# Altium PCB AM32_ESCRev1.PcbDoc
Units mil, origin at the board's own origin, x right, y up, seen from the top; angles counter-clockwise.
Board outline 2092 x 1284 mil, 4 copper layers (Top Layer 1, Top Layer, Bottom Layer, Bottom Layer 1), stack 23.756 mil thick; 73 components, 48 nets, 256 pads, 59 vias.
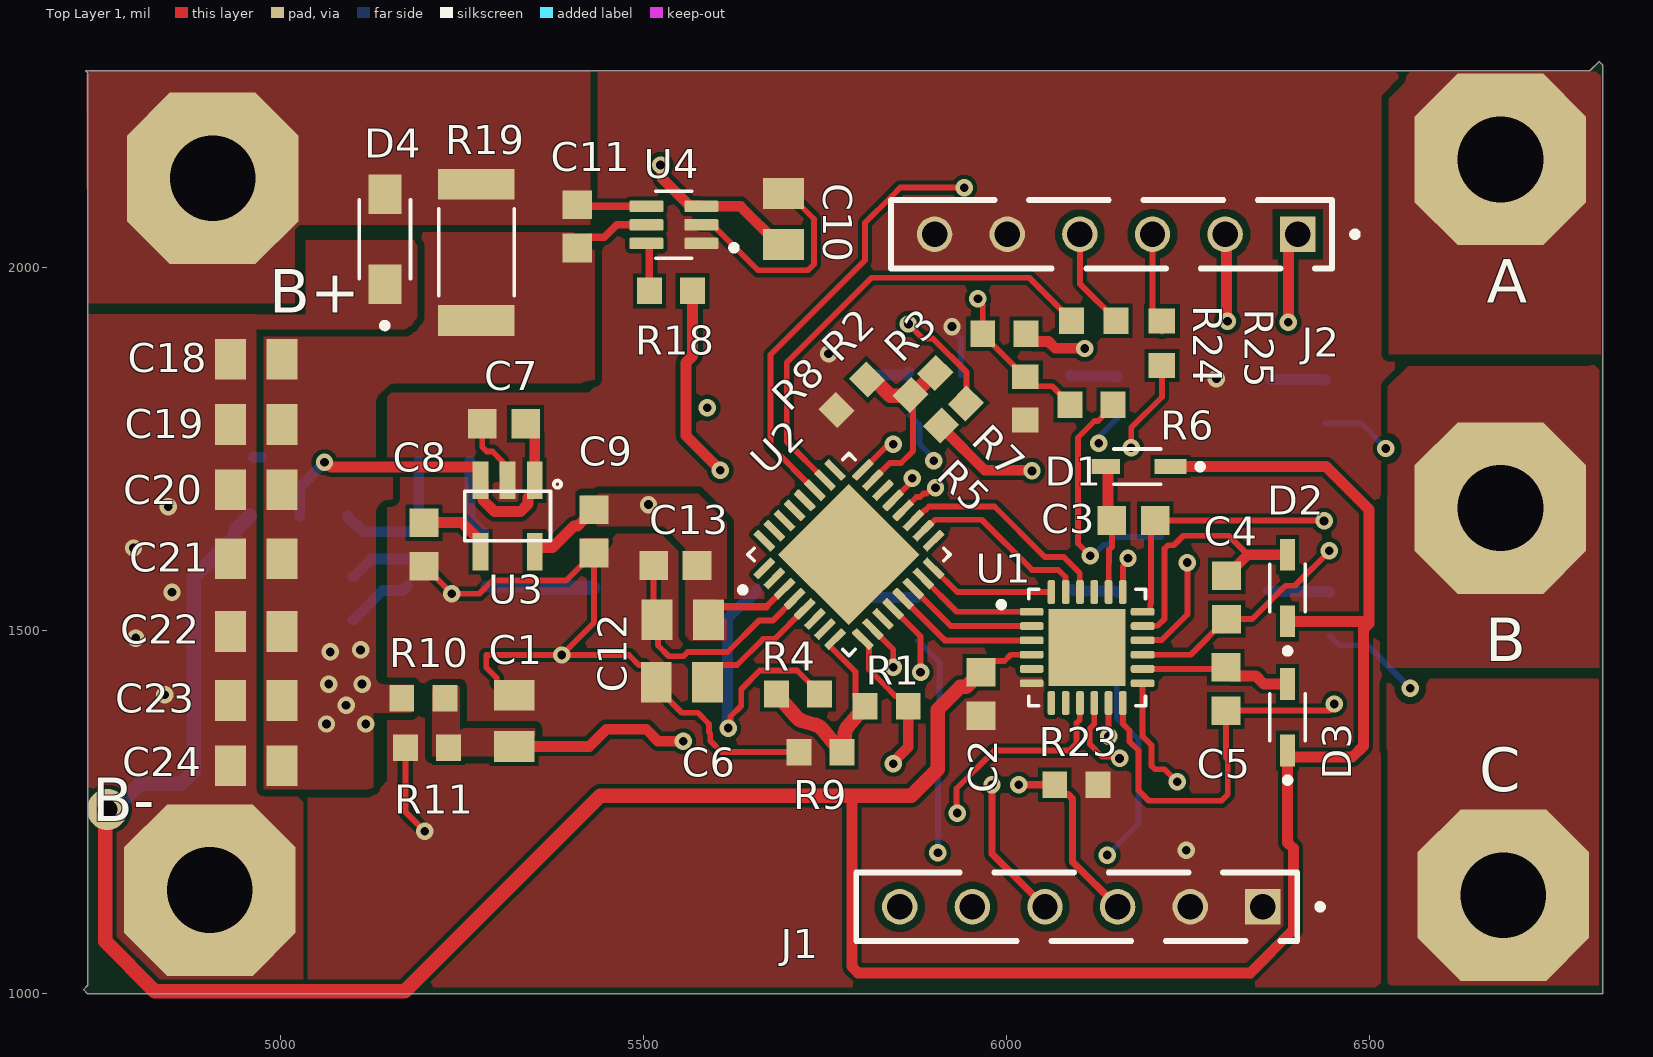
[diagram p0: Top Layer 1 view]
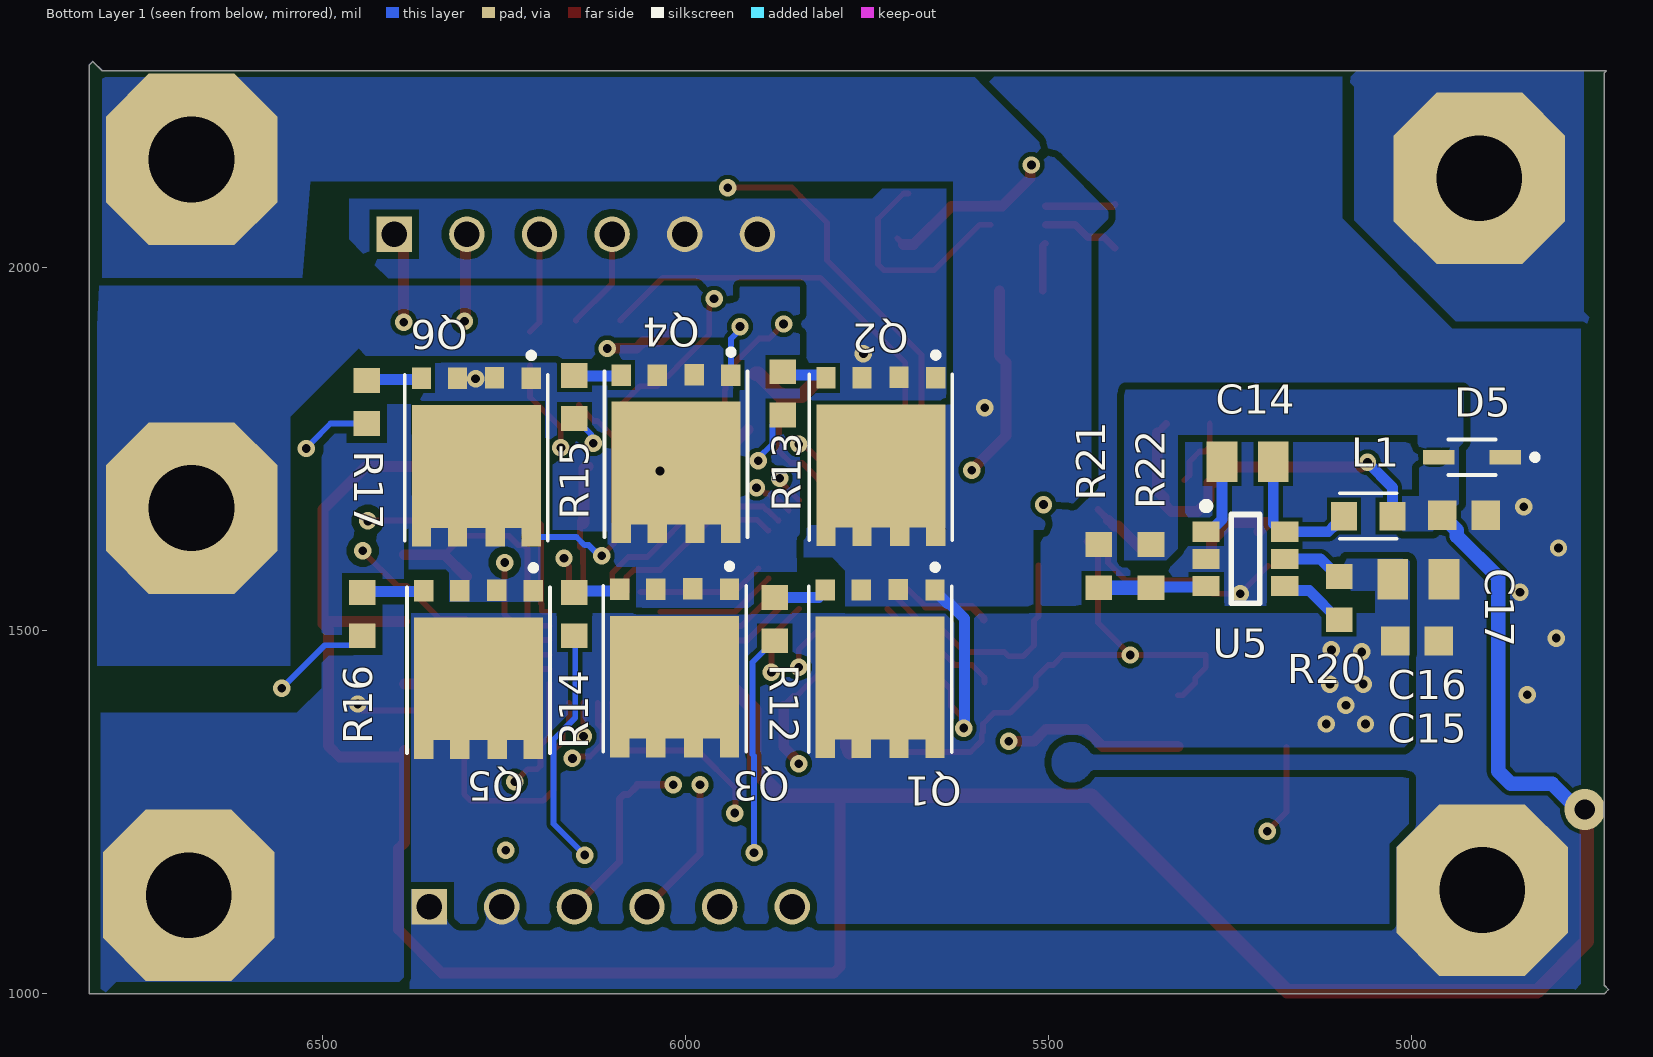
[diagram p1: Bottom Layer 1 view, seen from below]
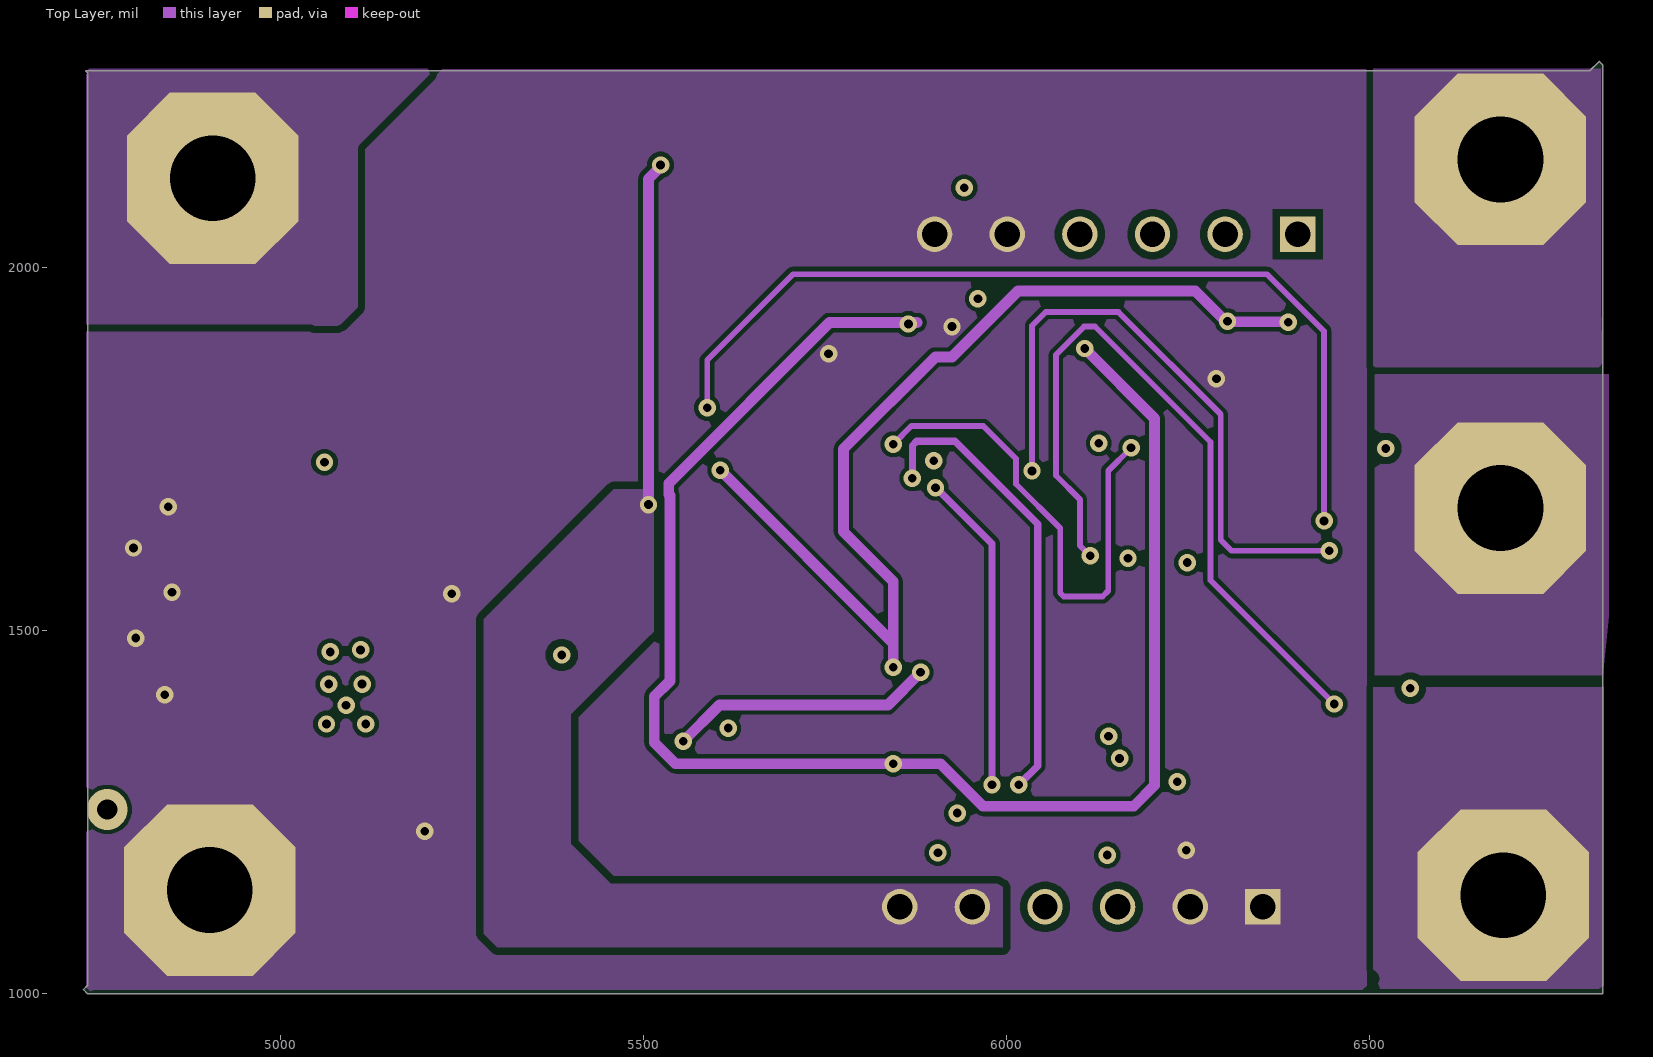
[diagram p2: Top Layer]
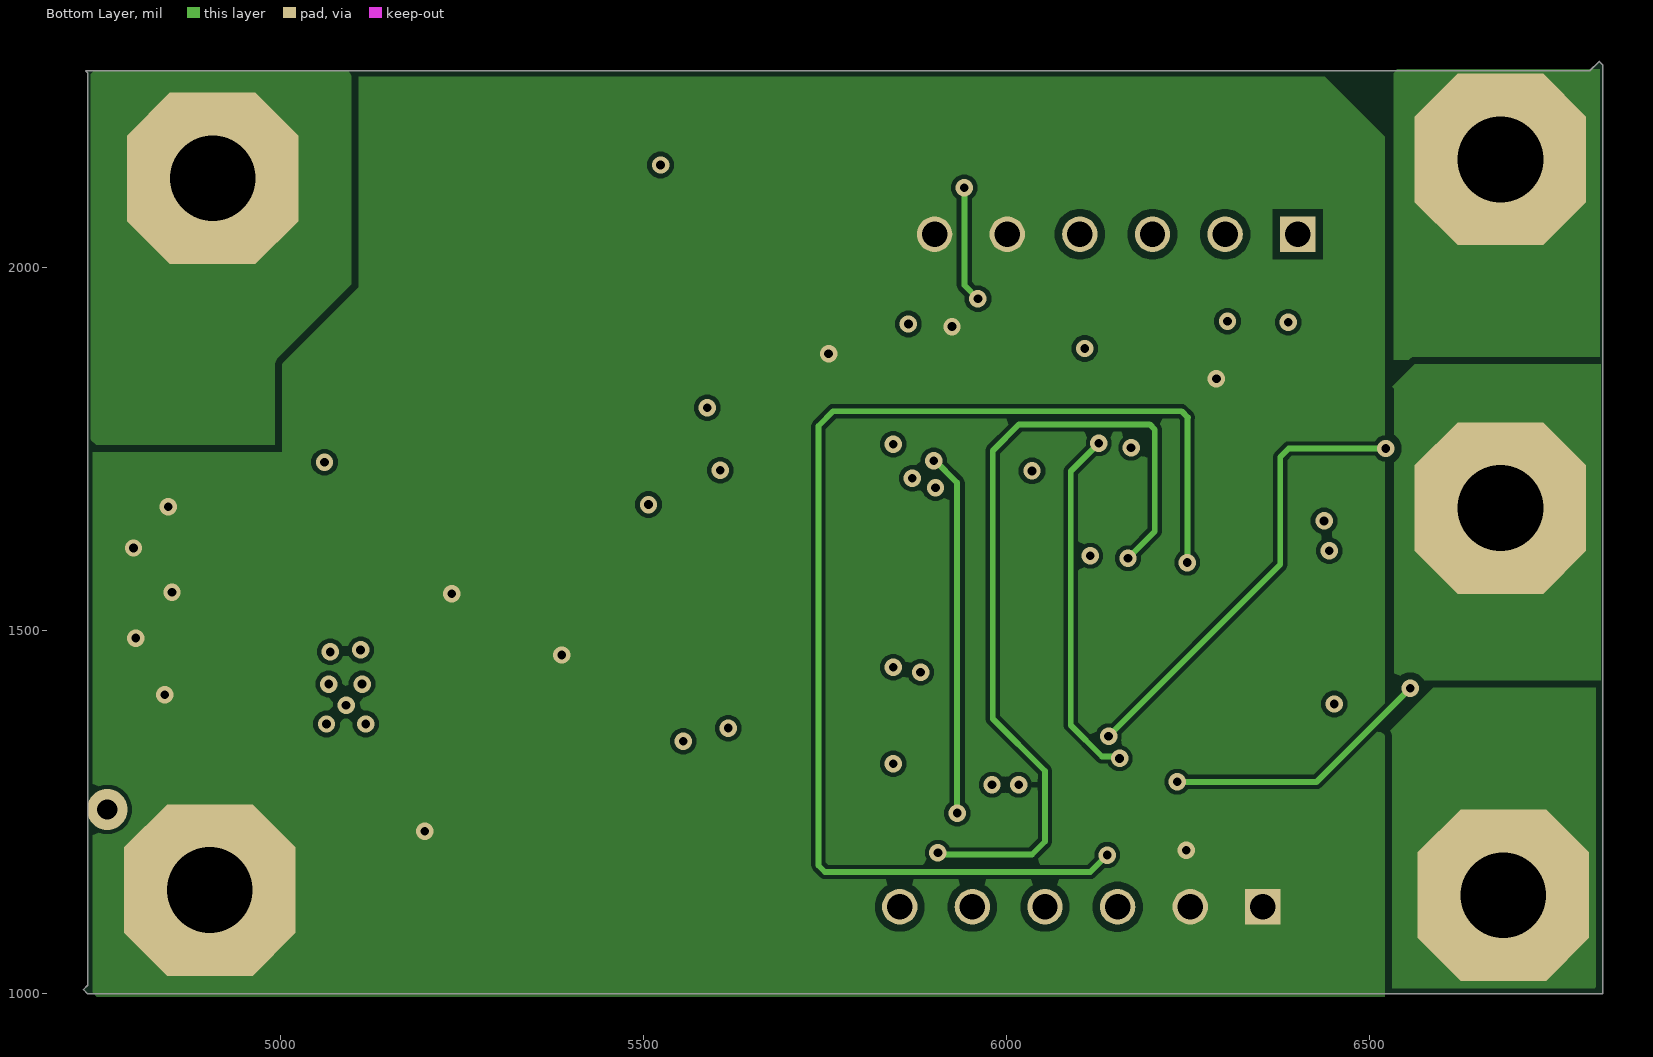
[diagram p3: Bottom Layer]
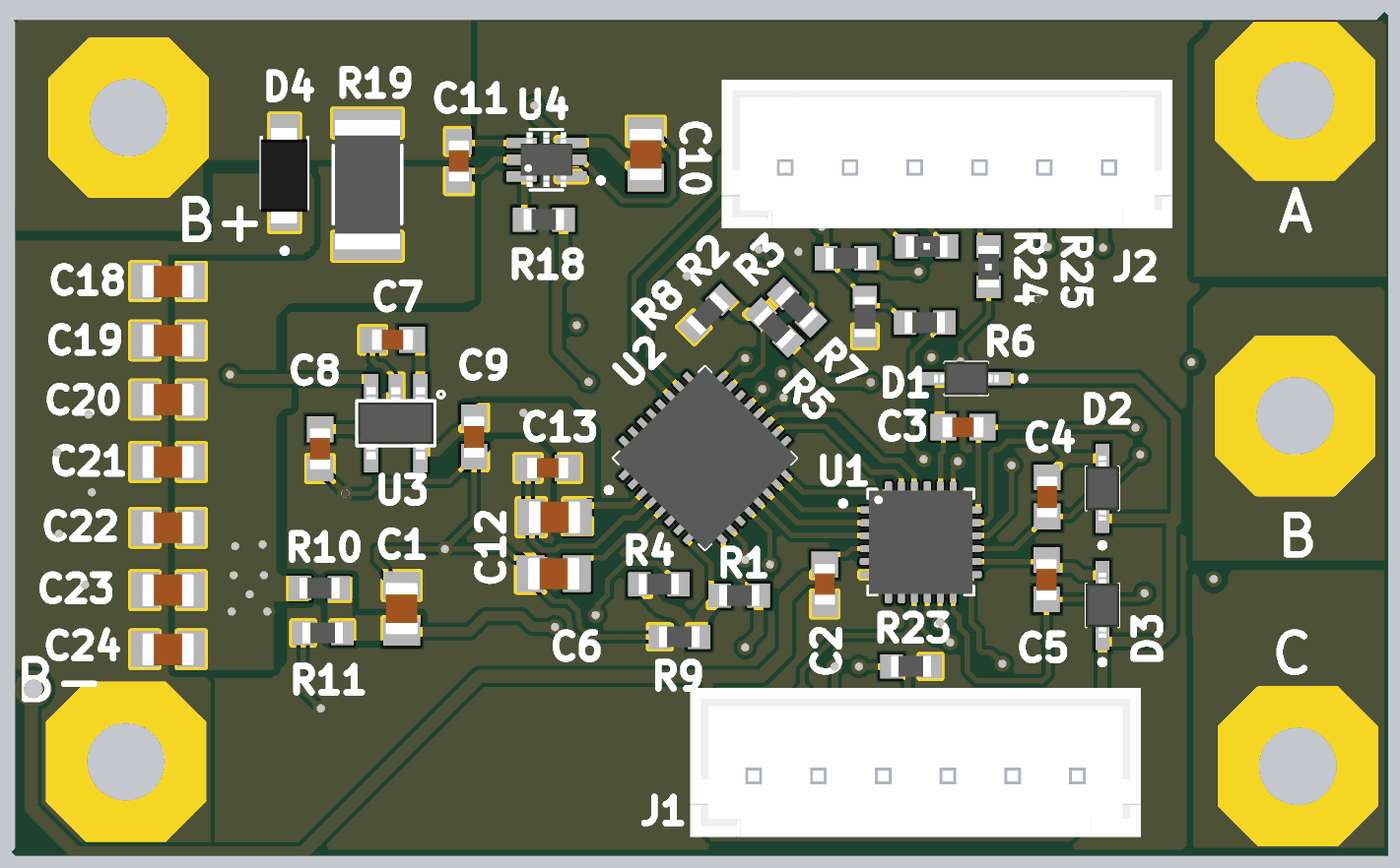
[diagram p4: 3D render of the assembled board from above, using the file's embedded part models]
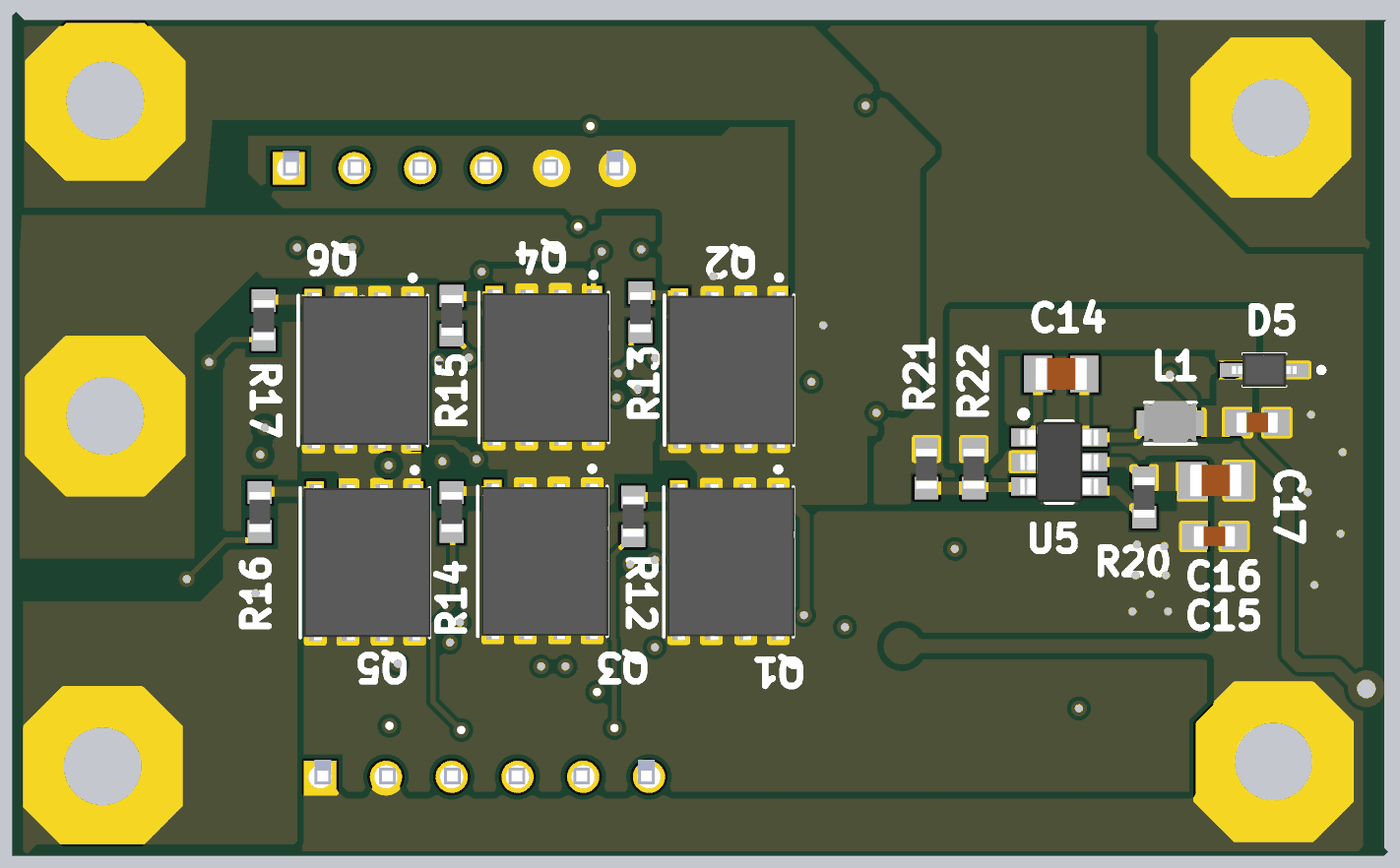
[diagram p5: 3D render of the assembled board from below, using the file's embedded part models]

## Layer stack, top to bottom
Top Solder: solder mask 0.4, Solder Resist, Dk 3.5
Top Layer 1: signal copper 1.378
Dielectric 2: prepreg 2.8, PP-006, Dk 4.1
Top Layer: signal copper 1.4
Dielectric 1: dielectric 12.6, FR-4, Dk 4.8
Bottom Layer: signal copper 1.4
Dielectric 3: prepreg 2.8, PP-006, Dk 4.1
Bottom Layer 1: signal copper 1.378
Bottom Solder: solder mask 0.4, Solder Resist, Dk 3.5

## Board outline
4735,2268 4735,1012 4729,1006 4735,1000 6821,1000 6821,2279 6816,2284 6803,2271 4732,2271

## Design rules (kind name [scope] priority, off if disabled: settings)
Clearance [All] p1: gap=6 ignorepadtopadclearanceinfootprint=FALSE except(10: THPad-THPad THPad-Fill THPad-Poly THPad-Region THPad-Text Fill-Fill Fill-Poly Fill-Region Fill-Text Poly-Poly Poly-Region Poly-Text Region-Region Region-Text Text-Text)
MinimumSolderMaskSliver [All] p1: minsoldermaskwidth=1
PolygonConnect [All] p1: connectstyle=Direct reliefconductorwidth=10 reliefentries=4 polygonreliefangle="90 Angle" airgapwidth=10
RoutingVias [All] p1: holewidth=28 width=50 viastyle="Through Hole" minholewidth=28 minwidth=50 maxholewidth=28 maxwidth=50
SilkToSilkClearance [All] p1: silktosilkclearance=4
SilkToSolderMaskClearance [IsPad] p1: minsilkscreentomaskgap=4 clearancetoexposedcopper=TRUE
SolderMaskExpansion SolderMaskExpansion_1 [All] p1: expansion=4 istentingtop=FALSE
SolderMaskExpansion SolderMaskExpansion_Via [IsVia] p2: expansion=4 istentingtop=TRUE soldermaskfromhole=TRUE
SupplyNets "Schematic Supply Nets_4" [InNet('8V')] p1: voltage=0.000
SupplyNets "Schematic Supply Nets_3" [InNet('VBAT')] p2: voltage=0.000
SupplyNets "Schematic Supply Nets_2" [InNet('3.3V')] p3: voltage=0.000
SupplyNets "Schematic Supply Nets_1" [InNet('GND')] p4: voltage=0.000
SupplyNets "Schematic Supply Nets" [InNet('VM')] p5: voltage=0.000
Width [All] p1: maxlimit=100 minlimit=8 preferedwidth=10 minimp=50.000000 maximp=50.000000 favimp=50.000000
27 further rules are at their usual default settings.

## Components (designator, comment, footprint, x,y, rotation, side; value= is the part's Value field where it differs from the comment)
A "PAD" PAD 6681,2150 r90 top
B "PAD" PAD 6681,1670 r90 top
B+ "PAD" PAD 4908,2124 r90 top
B- "PAD" PAD 4904,1144 r90 top
C "PAD" PAD 6685,1137 r90 top
C1 "100nF" C0805 5322,1376 r270 top
C2 "4.7uF" C0603 5965,1413 r90 top
C3 "1uF" C0603 6175,1652 r180 top
C4 "1uF" C0603 6303,1546 r90 top
C5 "1uF" C0603 6302,1420 r90 top
C6 "100nF" C0805 5553,1429 r0 top
C7 "1uF" C0603 5308,1785 r0 top
C8 "100pF" C0603 5198,1619 r270 top
C9 "2.2uF" C0603 5432,1637 r270 top
C10 "100nF" C0805 5693,2067 r270 top
C11 "1nF" C0603 5409,2057 r270 top
C12 "100nF" C0805 5554.24,1515 r0 top
C13 "4.7uF" C0603 5544,1590 r0 top
C14 "100nF" C0805 5226,1733 r180 bottom
C15 "100nF" C0805 4991,1571 r0 bottom
C16 "4.7uF" C0603 4993,1486 r0 bottom
C17 "10uF" C0603 4928,1659 r0 bottom
C18 "22uF" C0805 4967,1874 r0 top
C19 "22uF" C0805 4967,1784 r0 top
C20 "22uF" C0805 4967,1694 r0 top
C21 "22uF" C0805 4967,1599 r0 top
C22 "22uF" C0805 4967,1499 r0 top
C23 "22uF" C0805 4967,1404 r0 top
C24 "22uF" C0805 4967,1314 r0 top
D1 "Diode" SOD2512X116N 6180,1726 r180 top
D2 "Diode" SOD2512X116N 6387,1558.87 r90 top
D3 "Diode" SOD2512X116N 6387,1381 r90 top
D4 "SMF8.0A" SMF8.0 5144,2039 r90 top
D5 "Diode" SOD2512X116N 4917,1739 r0 bottom
J1 "JST_XH" "6 pin header" 6353,1120 r180 top
J2 "JST_XH" "6 pin header" 6401,2046 r180 top
L1 "6.8uH" L0806 5060,1658 r180 bottom
Q1 "CSD19531" MOSFET_CSD19531Q5A 5732,1446.86 r270 bottom
Q2 "CSD19531" MOSFET_CSD19531Q5A 5731,1738.86 r270 bottom
Q3 "CSD19531" MOSFET_CSD19531Q5A 6015,1447.86 r270 bottom
Q4 "CSD19531" MOSFET_CSD19531Q5A 6013,1742.86 r270 bottom
Q5 "CSD19531" MOSFET_CSD19531Q5A 6285,1445.86 r270 bottom
Q6 "CSD19531" MOSFET_CSD19531Q5A 6288.02,1738.3 r270 bottom
R1 "10K" R0603n 5835,1396 r180 top
R2 "10K" R0603n 5923,1834 r135 top
R3 "10K" R0603n 5997,1909 r180 top
R4 "47K" R0603N 5713,1413 r0 top
R5 "47K" R0603N 5888.73,1803.73 r315 top
R6 "47K" R0603N 6117,1811 r0 top
R7 "4.7K" R0603N 6026,1820 r90 top
R8 "4.7K" R0603N 5787,1825 r45 top
R9 "4.7K" R0603N 5744,1333 r0 top
R10 "47K" R0603N 5197,1407 r180 top
R11 "4.7K" R0603N 5202,1339 r0 top
R12 "10R" R0603n 5877,1516 r270 bottom
R13 "10R" R0603n 5866,1827 r90 bottom
R14 "10R" R0603n 6153,1523 r270 bottom
R15 "10R" R0603n 6153,1822 r90 bottom
R16 "10R" R0603n 6445,1523 r270 bottom
R17 "10R" R0603n 6439,1815 r90 bottom
R18 "56R" R0603N 5538,1968 r0 top
R19 "1m" RESC5025X120N 5270,2021 r270 top
R20 "100K" R0603N 5100,1545 r90 bottom
R21 "10K" R0603n 5431,1589 r270 bottom
R22 "90.9K" R0603N 5359,1589 r90 bottom
R23 "10K" R0603n 6096.14,1288 r0 top
R24 "100R" R0603 6214,1896 r270 top
R25 "100R" R0603 6120,1927 r180 top
U1 "FD6288Q" FD6288Q 6111,1477 r0 top
U2 "STM32G071" STM32G071 5783,1605 r45 top
U3 "AP2210K-3.3TRG1" AP2210K-3.3TRG1 5313,1658 r180 top
U4 "INA199A1DCKR" INA199A1DCKR 5542,2059 r180 top
U5 "JW5026" JW5026 5229,1599 r180 bottom

## Footprints (in the part's own frame and the unit in brackets; to place one, negate y for a bottom-side part, rotate by r counter-clockwise, add the part's x,y. Pads: shape width x height; smd on the part's side, far side on the other; paste and mask are expansions set on the pad)
"6 pin header" [mm]
  rect 1.24x1.24 hole 0.89: 01(0,0)
  round 1.24 hole 0.89: 02(2.54,0) 03(5.08,0) 04(7.62,0) 05(10.16,0) 06(12.7,0)
  silkscreen extent -2.1,-1.2 14.22,1.2, body extent -2.35,-3.43 15.05,2.32, height 6.51
AP2210K-3.3TRG1 [mm]
  rect 0.55x1.3 smd: 1(-0.95,-1.25) 2(0,-1.25) 3(0.95,-1.25) 4(0.95,1.25) 5(-0.95,1.25)
  silkscreen extent -1.87,-1.24 1.5,0.87, body extent -1.46,-1.4 1.46,1.4, height 1.45
C0603 [mm]
  rect 1x1.02 smd: 1(-0.759,0) 2(0.759,0)
  body extent -0.8,-0.4 0.8,0.4, height 1
C0805 [mm]
  rect 1.08x1.42 smd: 1(-0.895,0) 2(0.895,0)
  body extent -1,-0.63 1,0.63, height 1.4
FD6288Q [mm]
  rrect50% 0.83x0.27 smd: 1(-1.94,1.25) 2(-1.94,0.75) 3(-1.94,0.25) 4(-1.94,-0.25) 5(-1.94,-0.75) 6(-1.94,-1.25) 13(1.94,-1.25) 14(1.94,-0.75) 15(1.94,-0.25) 16(1.94,0.25) 17(1.94,0.75) 18(1.94,1.25)
  rrect50% 0.27x0.83 smd: 7(-1.25,-1.94) 8(-0.75,-1.94) 9(-0.25,-1.94) 10(0.25,-1.94) 11(0.75,-1.94) 12(1.25,-1.94) 19(1.25,1.94) 20(0.75,1.94) 21(0.25,1.94) 22(-0.25,1.94) 23(-0.75,1.94) 24(-1.25,1.94)
  rect 2.7x2.7 smd paste-2: 25(0,0)
  silkscreen extent -3.1,-2.04 2.04,2.04, body extent -2,-2 2,2, height 0.9
INA199A1DCKR [mm]
  rrect25% 1.19x0.4 smd: 1(-0.96,0.65) 2(-0.96,0) 3(-0.96,-0.65) 4(0.96,-0.65) 5(0.96,0) 6(0.96,0.65)
  silkscreen extent -2.2,-1.17 0.63,1.17, body extent -1.05,-1 1.05,1, height 1.1
JW5026 [mm] "SOT23, 6-Leads, Body 2.91x2.80mm, Pitch 0.95mm, IPC Medium Density"
  rect 0.95x0.7 smd: 1(-1.375,0.95) 2(-1.375,0) 3(-1.375,-0.95) 4(1.375,-0.95) 5(1.375,0) 6(1.375,0.95)
  silkscreen extent -1.5,-1.55 0.5,1.97, body extent -1.5,-1.55 1.5,1.55, height 1.25
L0806 [mm]
  rect 0.9x1 smd: 1(-0.85,0) 2(0.85,0)
  silkscreen extent -1,-0.8 1,0.8, body extent -1,-0.75 1,0.85, height 0.92
MOSFET_CSD19531Q5A [mm]
  rect 0.75x0.675 smd paste-1: 1(-2.776,1.917) 2(-2.794,0.635) 3(-2.776,-0.66) 4(-2.776,-1.917)
  rect 0.655x0.675 smd paste-1: 5(2.776,-1.917) 6(2.776,-0.66) 7(2.776,0.66) 8(2.776,1.917)
  rect 4.295x4.51 smd paste-3: 9(0.301,0)
  silkscreen extent -3.63,-2.5 2.9,2.5, body extent -3,-2.36 3,2.54, height 1.11
PAD [mm]
  oct 6x6 hole 3: 9(-0.025,0.025)
R0603 [mm]
  rect 0.87x0.93 smd: 1(-0.78,0) 2(0.78,0)
  body extent -0.8,-0.4 0.8,0.4, height 0.55
R0603n [mm]
  rect 0.87x0.93 smd: 1(-0.755,0) 2(0.755,0)
  body extent -0.77,-0.4 0.77,0.4, height 0.55
R0603N [mm]
  rect 0.87x0.93 smd: 1(-0.755,0) 2(0.755,0)
  body extent -0.77,-0.4 0.77,0.4, height 0.55
RESC5025X120N [mm]
  rect 1.07x2.67 smd: 1(-2.38,0) 2(2.38,0)
  silkscreen extent -1.52,-1.32 1.52,1.32, body extent -2.5,-1.25 2.5,1.25, height 1.2
SMF8.0 [mm]
  rect 1.38x1.15 smd: 1(-1.575,0) 2(1.575,0)
  silkscreen extent -3.11,-0.9 1.38,0.9, body extent -1.96,-0.88 1.74,0.92, height 1.26
SOD2512X116N [mm]
  rect 1.11x0.52 smd: 1(-1.165,0) 2(1.165,0)
  silkscreen extent -2.3,-0.62 0.82,0.62, body extent -1.25,-0.65 1.25,0.65, height 1.2
STM32G071 [mm]
  rrect25% 0.86x0.25 smd: 1(-2.435,1.75) 2(-2.435,1.25) 3(-2.435,0.75) 4(-2.435,0.25) 5(-2.435,-0.25) 6(-2.435,-0.75) 7(-2.435,-1.25) 8(-2.435,-1.75) 17(2.435,-1.75) 18(2.435,-1.25) 19(2.435,-0.75) 20(2.435,-0.25) 21(2.435,0.25) 22(2.435,0.75) 23(2.435,1.25) 24(2.435,1.75)
  rrect25% 0.25x0.86 smd: 9(-1.75,-2.435) 10(-1.25,-2.435) 11(-0.75,-2.435) 12(-0.25,-2.435) 13(0.25,-2.435) 14(0.75,-2.435) 15(1.25,-2.435) 16(1.75,-2.435) 25(1.75,2.435) 26(1.25,2.435) 27(0.75,2.435) 28(0.25,2.435) 29(-0.25,2.435) 30(-0.75,2.435) 31(-1.25,2.435) 32(-1.75,2.435)
  rect 3.5x3.5 smd paste-0.643: 33(0,0)
  silkscreen extent -3.6,-2.5 2.5,2.5, body extent -2.5,-2.5 2.5,2.5, height 0.6

## Part data
C1 C6 C10 C12 C14 C15: library part C100nF
C2 C13 C16: library part C4.7uF
C3 C4 C5 C7: library part C1uF
C8: library part C100pF
C9: library part C2.2uF
C11: library part C1nF
C17: library part C10uF
C18 C19 C20 C21 C22 C23 C24: library part C22uF
L1: library part L6.8uH
Q1 Q2 Q3 Q4 Q5 Q6: library part MOSFET
R1 R2 R3 R21 R23: library part R10K
R4 R5 R6 R10: library part R47K
R7 R8 R9 R11: library part R4.7K
R12 R13 R14 R15 R16 R17: library part R10
R18: library part R56
R19: library part R1m
R20: library part R100K
R22: library part R90.9k

## Via types
v1: diameter 24, hole 12, Top Layer 1 to Bottom Layer 1, tented both sides, 58 vias
v2: diameter 56, hole 28, Top Layer 1 to Bottom Layer 1, tented both sides, 1 vias

## Nets (pads, with @x,y where several pads share a name; then routed paths per layer and width w, separated by ;. In a path a pad name is that pad's centre, name@x,y a point inside that pad or via, vN(x,y) a via of type N, cw(c..) or ccw(c..) an arc to the next point about the centre after c; other vN are vias at no path point)
3.3V: C9.1 C10.2 C12.2 C13.2 J1.05 J1.06 U2.3 U3.5 U4.3 | length 948.3
  Top Layer 1 w8: 5669.34,1533 U2.3@5694.33,1557.99 ; C10.2@5699.69,2031.76 C10.2@5708.34,2040.41
  Top Layer 1 w10: C9.1@5417.31,1652.2 C9.1 ; C12.2 5589.47,1516.74 5605.73,1533 5669.34,1533
  Top Layer 1 w15: U3.5 5353.73,1612.11 5353.73,1614.57 5374.94,1614.57 5404.67,1644.3 5409.42,1644.3 C9.1@5417.31,1652.2 ; v1(5523.64,2141.36) 5525.36,2139.64 5525.36,2123.47 5563.87,2084.96 5579.42,2084.96 U4.3 5633.48,2084.59 5686.31,2031.76 C10.2 C10.2@5699.69,2031.76
  Top Layer w15: v1(5507.05,1673.83) 5507.05,2122.33 5523.64,2138.92 v1(5523.64,2141.36)
8V: C2.2 C7.2 C17.2 D1.1 D2.1 D3.1 D5.2 L1.2 R22.2 U1.4 U3.1 U3.3 | length 4782.2
  Top Layer 1 w8: C2.2 5980.69,1458.57 5997.39,1458.57 6005.98,1467.16 U1.4
  Top Layer 1 w10: C7.2 C7.2@5350.4,1772.48
  Top Layer 1 w15: v1(5061,1732) 5063.44,1732 5070.13,1725.3 5272.27,1725.3 U3.3@5272.27,1703.89 ; U3.3 5278.93,1703.89 5278.93,1689.12 5278.93,1680.12 5294.92,1664.12 5331.08,1664.12 5341.33,1674.37 5341.33,1683.37 5350.4,1692.45 U3.1 C7.2@5350.4,1772.48 ; 5785,1273 5787,1271 5787,1037.79 5795.79,1029 6335.57,1029 6394.91,1088.34 6394.91,1200.61 6387,1208.52 D3.1@6387,1328.74 ; D1.1 6440,1726 6499,1667 6499,1509.72 6491.5,1502.22 6491.5,1341.5 6476,1326 6389.74,1326 D3.1@6387,1328.74 ; D3.1 D3.1@6387,1328.74 ; D2.1 6494,1513 6498.14,1508.86
  Top Layer 1 w20: v2(4762,1254) 4758.89,1250.89 4758.89,1072.32 4827.32,1003.89 5171.6,1003.89 5440.71,1273 5785,1273 5869,1273 5905.45,1309.45 5905.45,1391.61 5936.64,1422.8 5944.53,1422.8 5964.61,1442.88 C2.2
  Bottom Layer 1 w15: D5.2 D5.2@4974.48,1739 ; L1.2 5026.54,1697.54 v1(5061,1732)
  Bottom Layer 1 w20: v2(4762,1254) 4771.74,1254 4806.91,1289.17 4863.68,1289.17 4881,1306.5 4881,1573.73 4937.8,1630.54 4937.8,1638.53 4957.88,1658.61 C17.2
ADC_BAT: C1.2 R10.1 R11.2 U2.12 | length 718.6
  Top Layer 1 w8: U2.12 5881.67,1492.41 v1(5881.67,1443)
  Top Layer 1 w15: C1.2 5425.42,1340.76 5449.15,1364.5 5503.88,1364.5 5520.38,1348 v1(5555,1348)
  Top Layer w15: v1(5555,1348) 5605,1398 5836.67,1398 v1(5881.67,1443)
ADC_CUR: J2.01 J2.02 R18.2 U2.10 | length 1965.5
  Top Layer 1 w8: U2.10 5844,1474.4 v1(5844,1450) ; J2.02 J2.02@6303,2044 ; J2.01@6388,2033 J2.01
  Top Layer 1 w15: R18.2 5567.72,1878.6 5558.5,1869.37 5558.5,1768.5 v1(5606,1721) ; v1@6303,1926.1 J2.02@6303,2044 ; v1(6388,1925) J2.01@6388,2033
  Top Layer w8: v1(6304.23,1926.1) v1@6304.78,1925.55 ; v1@6387.45,1925.55 v1(6388,1925)
  Top Layer w15: v1(5606,1721) 5842.5,1484.5 ; v1(5844,1450) 5844,1484.5 5844,1567.98 5775.31,1636.66 5775.31,1750.31 5902,1877 5925,1877 6016,1968 6259.89,1968 6301.79,1926.1 v1(6304.23,1926.1) ; v1@6304.78,1925.55 v1@6387.45,1925.55
ESC_S1: R24.2 U2.24 | length 877
  Top Layer 1 w8: U2.24 5834.5,1753.94 5840.94,1753.94 v1(5844,1757) ; v1(6171.54,1751.87) 6171.87,1752.21 6171.87,1779.87 6214,1822 R24.2
  Top Layer w8: v1(5844,1757) 5869,1782 5968,1782 6013.05,1736.95 6013.05,1702.16 6074,1641.21 6074,1552 6078.69,1547.31 6132.31,1547.31 6140,1555 6140,1720.34 v1(6171.54,1751.87)
FB: R21.2 R22.1 U5.3 | length 148.8
  Bottom Layer 1 w15: U5.3 5284.3,1560.44 5357.84,1560.44 R22.1
  Bottom Layer 1 w20: R22.1 R21.2
GND: B-.9 C1.1 C2.1 C6.1 C7.1 C8.2 C9.2 C10.1 C12.1 C13.1 C15.1 C16.1 C17.1 C18.1 C19.1 C20.1 C21.1 C22.1 C23.1 C24.1 D4.1 D5.1 J1.01 J1.02 J2.05 J2.06 Q2.1 Q2.2 Q2.3 Q4.1 Q4.2 Q4.3 Q6.1 Q6.2 Q6.3 R7.1 R8.1 R9.1 R11.1 R21.1 R23.2 U1.6 U2.4 U3.2 U4.1 U4.2 U5.2 | length 1992.9
  Top Layer 1 w8: R11.1@5172.28,1340.18 R11.1 5172.28,1250.72 v1(5199,1224) ; C8.2 5198.39,1589.12 5236,1551.51 v1(5236,1551) 5274.03,1551 5292.22,1569.2 5393.69,1569.2 5418.33,1593.84 5418.33,1622.8 C9.2@5448.08,1622.8 ; C7.1@5278.12,1785.39 C7.1 5278.12,1752.92 5284.24,1746.8 5292.22,1746.8 5306.17,1732.85 5306.17,1714.04 U3.2 ; C1.1 5315.31,1411.24 5298.05,1428.5 5298.05,1435.19 5283.64,1449.6 5283.64,1466.67 v1(5387.67,1466.67) ; C9.2 5432,1511 v1(5387.67,1466.67) ; C13.1 5514.12,1519.88 C12.1 5520.27,1513.73 5520.27,1479.73 5535,1465 5555.22,1465 5561.18,1470.95 5615.95,1470.95 5659,1514 5678.08,1514 U2.4 ; U4.2 5595.35,2059 5657.84,1996.5 5726.75,1996.5 5734.95,2004.7 5734.95,2066.98 5699.69,2102.24 C10.1 ; R9.1 5607.73,1333 5592.05,1348.68 5592.05,1358.77 5590.5,1360.32 5590.5,1371.82 5575.27,1387.05 5553.02,1387.05 5517.76,1422.31 C6.1 5517.76,1435.69 5500.5,1452.95 5493.81,1452.95 5480.1,1466.67 v1(5387.67,1466.67)
  Bottom Layer 1 w8: v1(5924.94,1918.94) 5924.94,1914.61 5937.51,1902.05 Q4.1
  other v1: 6247.67,1197.67 4841,1412 4801,1490 4851,1553 4798,1614 4846,1671 6289,1847 5755,1881.67
MOS_AH: R12.2 U1.19 | length 1513.8
  Top Layer 1 w8: U1.19 6160.21,1588.64 6167.24,1595.67 v1(6167.24,1600)
  Bottom Layer w8: v1(5905.55,1194.24) 5907.79,1192 6035,1192 6053,1210 6053,1307 5981,1379 5981,1748 6017.24,1784.24 6197.08,1784.24 6204,1777.31 6204,1636.76 v1(6167.24,1600)
  Bottom Layer 1 w8: R12.2 5878.18,1486.28 5907.67,1456.79 5907.67,1330.05 5905.55,1327.93 5905.55,1195.55 v1@5904,1194
MOS_AL: R13.1 U1.9 | length 860.3
  Top Layer 1 w8: v1(5932,1249) 5931,1250 5931,1283 5983,1335 6086,1335 6096.53,1345.53 6096.53,1372.99 6100.79,1377.25 6100.79,1400.25 U1.9
  Bottom Layer w8: v1(5900,1734) 5902,1734 5932,1704 v1(5932,1249)
  Bottom Layer 1 w8: R13.1 5867.18,1797.28 5880.31,1784.15 5880.31,1757.12 5900,1737.43 v1(5900,1734)
MOS_BH: R14.2 U1.16 | length 2217.1
  Top Layer 1 w8: U1.16 6187.75,1487.21 6213.73,1487.21 6249,1522.48 v1(6249,1594)
  Bottom Layer w8: v1(6138.55,1191.24) 6115.31,1168 5750,1168 5741,1177 5741,1782 5761.24,1802.24 6241.14,1802.24 6249.69,1793.69 6249,1793 v1(6249,1594)
  Bottom Layer 1 w8: v1(6138.55,1191.24) 6181.64,1234.33 6181.64,1350.43 6151.82,1380.24 6151.82,1492.09 R14.2
MOS_BL: R15.1 U1.10 | length 644.2
  Top Layer 1 w8: U1.10 6120.84,1371.85 6114.53,1365.54 6114.53,1344 6131.64,1326.89 6153.06,1326.89 v1(6155.64,1324.31)
  Bottom Layer w8: v1(6127,1758.24) 6088.56,1719.8 6088.56,1369.96 6131.64,1326.89 6153.06,1326.89 v1(6155.64,1324.31)
  Bottom Layer 1 w8: v1(6127,1758.24) 6130.06,1761.3 6130.06,1770.52 6151.82,1792.28 R15.1
MOS_CH: R16.2 U1.13 | length 678.7
  Top Layer 1 w8: U1.13 6187.38,1354.8 6199.64,1342.53 6199.64,1314.03 6204.32,1309.34 6217.66,1309.34 v1(6235,1292)
  Bottom Layer w8: v1(6235,1292) 6427,1292 v1(6556,1421)
  Bottom Layer 1 w8: R16.2 6458.13,1480.15 6496.85,1480.15 v1(6556,1421)
MOS_CL: R17.1 U1.11 | length 766.5
  Top Layer 1 w8: v1(6140.53,1354.77) U1.11
  Bottom Layer w8: v1(6140.53,1354.77) 6377,1591.24 6377,1739.31 6388.69,1751 v1(6522,1751)
  Bottom Layer 1 w8: R17.1 6488.72,1785.28 v1@6516,1758
MOTOR_A: A.9 C3.1 Q1.1 Q1.2 Q1.3 Q2.5 Q2.6 Q2.7 Q2.8 Q2.9 R4.2 U1.18 | length 2033.9
  Top Layer 1 w8: v1(5617.01,1366.04) 5620.07,1369.1 5620.07,1382.07 5634.68,1396.68 5634.68,1419.63 5660.35,1445.31 5711.6,1445.31 5742.72,1414.18 R4.2 ; U1.18 6196.6,1526.21 6197.91,1527.53 6197.91,1536.75 6199,1537.83 6199,1646.12 C3.1 v1@6433,1652
  Top Layer w8: v1@5588,1800.22 5588,1873 5706,1991 6358.77,1991 6437.24,1912.53 v1(6437.24,1651.27)
  Bottom Layer 1 w15: v1(5617.01,1366.04) 5616,1367.05 5616,1517.08 5636.33,1537.4 5639.23,1537.4 5656.51,1554.68 Q1.1
  other v1: 5588,1807
MOTOR_B: B.9 C4.1 Q3.1 Q3.2 Q3.3 Q4.5 Q4.6 Q4.7 Q4.8 Q4.9 R5.2 U1.15 | length 1312.4
  Top Layer 1 w8: U1.15 6253.65,1467.16 6302.61,1516.12 C4.1 6338.23,1516.12 6384.11,1562 6397,1562 v1@6445,1610
  Top Layer 1 w15: R5.2@5914.02,1776.98 5970,1721 v1@6032,1721
  Top Layer w8: v1(6035.05,1720.15) 6035.05,1920.05 6054,1939 6154,1939 6295,1798 6295,1625 6309.73,1610.27 v1(6444.24,1610.27)
MOTOR_C: C5.1 C.9 Q5.1 Q5.2 Q5.3 Q6.5 Q6.6 Q6.7 Q6.8 Q6.9 R6.2 U1.12 | length 1896.6
  Top Layer 1 w8: v1(6115.24,1603.27) 6098.28,1620.25 6098.28,1766.29 6120.99,1789 6125.91,1789 6146.72,1809.82 R6.2 ; U1.12 6160.21,1371.85 6169.38,1362.69 6169.38,1347.34 6181.64,1335.08 6181.64,1280.36 6196,1266 6296,1266 6304.69,1274.69 6304.69,1323.22 6302,1325.9 C5.1 6445.12,1390.12 v1@6450,1395
  Top Layer w8: v1(6115.24,1603.27) 6101,1617.51 6101,1681 6068,1714 6068,1880.11 6106.89,1919 6122,1919 6281,1760 6281,1569.51 v1(6451.24,1399.27)
  Bottom Layer 1 w8: v1(6115.24,1603.27) 6118.61,1603.27 6133.31,1617.96 6138.96,1617.96 6150,1629 Q6.8
NetC6_2: C6.2 U2.5 | length 179.8
  Top Layer 1 w8: C6.2 5588.24,1435.69 5605.5,1452.95 5629,1452.95 5664.89,1488.85 5680.77,1488.85 U2.5
NetC8_1: C8.1 U3.4 | length 120.1
  Top Layer 1 w15: C8.1@5210.19,1636.7 C8.1 5250.27,1648.88 5275.6,1623.55 U3.4
NetC14_1: C14.1 U5.1 | length 108.6
  Bottom Layer 1 w10: U5.1@5278.21,1636.4 U5.1
  Bottom Layer 1 w15: C14.1 5261.24,1653.38 U5.1@5278.21,1636.4
NetC14_2: C14.2 L1.1 U5.6 | length 197.6
  Bottom Layer 1 w15: L1.1 5093.46,1656.03 5103.68,1645.81 5105.65,1645.81 5115.06,1636.4 U5.6 5179.79,1636.4 5190.76,1647.38 C14.2
NetJ2_3: J2.03 R24.1 | length 139.7
  Top Layer 1 w8: J2.03 6201,1924.71 R24.1@6214,1911.71
NetJ2_4: J2.04 R25.1 | length 139.6
  Top Layer 1 w8: J2.04 6101,1977.89 6150.71,1928.18 R25.1
NetQ1_4: Q1.4 R12.1 | length 74.7
  Bottom Layer 1 w15: Q1.4 5807.49,1554.68 5816.45,1545.72 R12.1
NetQ2_4: Q2.4 R13.2 | length 63.1
  Bottom Layer 1 w15: Q2.4 5810.77,1852.44 5861.72,1852.44 R13.2
NetQ3_4: Q3.4 R14.1 | length 64.3
  Bottom Layer 1 w15: Q3.4 6092.71,1554.94 6150.78,1554.94 R14.1
NetQ4_4: Q4.4 R15.2 | length 65.5
  Bottom Layer 1 w15: Q4.4 6089.71,1850.94 6151.78,1850.94 R15.2@6153,1849.72
NetQ5_4: Q5.4 R16.1 | length 85.5
  Bottom Layer 1 w15: Q5.4 6361.71,1553.94 6443.78,1553.94 R16.1
NetQ6_4: Q6.4 R17.2 | length 76.7
  Bottom Layer 1 w15: Q6.4 6364.95,1846.16 6437.56,1846.16 R17.2
NetR18_1: R18.1 U4.6 | length 67.8
  Top Layer 1 w10: U4.6 5505.4,2033.41 5508.28,2030.54 R18.1
NetR20_1: R20.1 U5.4 | length 94.1
  Bottom Layer 1 w15: R20.1 5101.18,1515.28 5141.22,1555.32 5168.59,1555.32 U5.4
PWM_AH: U1.22 U2.19 | length 300.8
  Top Layer 1 w8: U2.19 5872.75,1651.91 5886.93,1666.1 5888.46,1666.1 5893.37,1671.01 5983.52,1671.01 6052.82,1601.72 6078.8,1601.72 6100.79,1579.73 U1.22@6100.79,1553.75
PWM_AL: U1.1 U2.15 | length 168
  Top Layer 1 w8: U2.15 5931.38,1526.21 U1.1
PWM_BH: U1.23 U2.18 | length 255.2
  Top Layer 1 w8: U2.18 5886.67,1637.99 5901.69,1653.01 5965.99,1653.01 6035.28,1583.72 6071.34,1583.72 6081.1,1573.96 6081.1,1553.75 U1.23
PWM_BL: U1.2 U2.14 | length 184.3
  Top Layer 1 w8: U2.14 5923.23,1506.53 U1.2
PWM_CH: U1.24 U2.16 | length 175.8
  Top Layer 1 w8: U2.16 5932.06,1553.38 U1.24
PWM_CL: U1.3 U2.13 | length 200.6
  Top Layer 1 w8: U2.13 5915.08,1486.84 U1.3
SENSE_A: R1.2 R4.1 R9.2 U2.8 | length 313.1
  Top Layer 1 w8: U2.8 5756.31,1480.87 5756.31,1479.57 5792.15,1443.73 5792.15,1409.13 R1.2
  Top Layer 1 w20: R4.1 5690.4,1404.69 5710.51,1381.57 ccw(c5725.6,1394.69) 5719.97,1375.5 5737.03,1370.5 cw(c5731.4,1351.31) 5746.99,1363.84 5758.4,1349.65 ccw(c5781.78,1368.44) 5760.76,1347.04 5766.6,1341.31 R9.2 5777.02,1341.31 5777.02,1355.49 cw(c5797.02,1355.49) 5781.78,1368.44 5798.15,1387.69 R1.2
SENSE_B: R2.2 R5.1 R8.2 U2.23 | length 261.3
  Top Layer 1 w8: U2.23@5817.07,1707.59 U2.23 5839.4,1731 5854.77,1731 5871.15,1747.38 5871.15,1818.18 R5.1@5871.98,1819.02
  Top Layer 1 w20: R8.2 5818.1,1846.02 5840.2,1823.92 5866.88,1823.92 R5.1 5870.72,1824.75 5899.98,1854.02 R2.2@5902.98,1854.02
SENSE_C: R3.2 R6.1 R7.2 U2.27 | length 977.4
  Top Layer 1 w8: U2.27 5675,1754.76 5675,1880 5805.21,2010.21 5805.21,2061.68 5841.58,2098.04 5853.73,2110.23 v1(5942,2110.23) ; v1@5960,1956 5967.28,1948.72 R3.2 5967.28,1907.82 6011.69,1863.4 6011.69,1862.85 6024.82,1849.72 R7.2 6039.13,1836.6 6062.86,1836.6 6087.28,1812.18 R6.1
  Bottom Layer w8: v1(5942,2110.23) 5942,1975.69 v1(5960.67,1957.02)
SENSE_O: R1.1 R2.1 R3.1 U2.9 | length 2625.8
  Top Layer 1 w8: U2.9 5810.56,1480 5810.56,1446.67 5833.23,1424 5846.92,1410.31 5851.6,1410.31 5864.72,1397.18 R1.1 ; v1(5864.95,1922.43) 5884.75,1902.62 5898.38,1902.62 5945.11,1855.89 5945.11,1832.13 5945.85,1831.38 5945.85,1812.82 R2.1@5945.02,1811.98
  Top Layer 1 w15: v1(5844,1317) 5844,1319.44 5864.72,1340.16 R1.1 ; R3.1 6026.72,1907.82 6036.35,1898.19 6057.92,1898.19 6067.11,1889 v1@6104,1889
  Top Layer w15: 5876.95,1924.43 5756.43,1924.43 5535,1703 5535,1687.6 5536.55,1686.05 5536.55,1431.13 5515,1409.59 5515,1346.28 5544.28,1317 v1(5844,1317) 5909.28,1317 5967.78,1258.5 6175.21,1258.5 6204,1287.29 6204,1792.33 v1(6107.67,1888.67)
SWCLK: J1.03 R23.1 U2.21 | length 935.5
  Top Layer 1 w8: U2.21 5870.23,1706.15 v1(5870.23,1710.1)
  Top Layer 1 w10: v1(6017,1288) R23.1 6066.42,1286.82 6078.54,1274.69 6085.14,1274.69 6091,1268.84 6091,1182 J1.03
  Top Layer w10: v1(5870.23,1710.1) 5870.57,1710.44 5870.57,1755.14 5876.43,1761 5929,1761 6043,1647 6043,1314 v1(6017,1288)
SWDIO: J1.04 U2.20 | length 697.3
  Top Layer 1 w8: U2.20 5876.02,1684.1 5881,1684.1 5885.91,1689.01 5889.89,1689.01 5897.89,1697.01 v1(5902.22,1697.01)
  Top Layer 1 w10: v1(5980,1288) 5980,1193 J1.04
  Top Layer w10: v1(5902.22,1697.01) 5902.99,1697.01 5980,1620 v1(5980,1288)
UART_TX: R25.2 U2.26 | length 649
  Top Layer 1 w8: U2.26 5697.31,1760.28 5697.31,1869.31 5814,1986 6031.47,1986 6089.29,1928.18 R25.2
VB_A: C3.2 D1.2 U1.20 | length 183.4
  Top Layer 1 w8: U1.20 6140.9,1553.75 6140.9,1592.15 6141.24,1592.5 6141.24,1611.45 6145.12,1615.32 C3.2
  Top Layer 1 w15: D1.2 6136.89,1726 6139.63,1723.26 6139.63,1648.31 C3.2@6140.53,1647.41
VB_B: C4.2 D2.2 U1.17 | length 361.7
  Top Layer 1 w8: U1.17 6187.75,1506.9 6207.96,1506.9 6217.72,1516.66 6217.72,1613.23 6222.4,1617.92 6230.37,1617.92 6243.44,1631 6305.98,1631 6332.24,1604.73
  Top Layer 1 w15: C4.2@6301.66,1574.55 6302.06,1574.55 6332.24,1604.73 D2.2
VB_C: C5.2 D3.2 U1.14 | length 208.2
  Top Layer 1 w8: U1.14 C5.2@6299.59,1447.47
  Top Layer 1 w15: C5.2@6299.59,1447.47 6309.37,1437.7 6343.43,1437.7 6354.26,1426.87 D3.2
VBAT: B+.9 C11.1 D4.2 R19.1 U4.4 | length 96.2
  Top Layer 1 w10: C11.1 5411.29,2084.59 U4.4
VM: C11.2 C15.2 C16.2 C18.2 C19.2 C20.2 C21.2 C22.2 C23.2 C24.2 Q1.5 Q1.6 Q1.7 Q1.8 Q1.9 Q3.5 Q3.6 Q3.7 Q3.8 Q3.9 Q5.5 Q5.6 Q5.7 Q5.8 Q5.9 R10.2 R19.2 R20.2 U4.5 U5.5 | length 193.3
  Top Layer 1 w10: C11.2 5423.69,2041.8 5446.33,2041.8 5463.53,2059 U4.5
  Bottom Layer 1 w15: R20.2 5101.18,1574.72 5125.46,1599 U5.5
  other v1: 5063.67,1371.67 5117.67,1371.67 5090.67,1397.67 5066.67,1426.67 5112.67,1426.67 5069,1470.96 5110.67,1473.67
pads on no net: U1.5 U1.7 U1.8 U1.21 U1.25 U2.1 U2.2 U2.6 U2.7 U2.11 U2.17 U2.22 U2.25 U2.28 U2.29 U2.30 U2.31 U2.32 U2.33

## Polygon pours and split planes (outlines as drawn)
MOTOR_C on Top Layer 1 "MOTOR_C_L01_P033" (solid, pour order 33): 6814,1434 6523.5,1434 6523.5,1017 6528.5,1012 6815.5,1012 6815.5,1432.5
GND on Top Layer 1 "GND_L01_P047" (solid, pour order 47): 5038.16,1000.16 5038.16,1270.16 5124.16,1270.16 5147.66,1293.67 5147.66,1827.66 5424.66,1827.66 5438.16,1841.16 5433.16,1846.16 5433.16,2269.16 6558.16,2269.16 6561.16,2266.16 6534.66,2239.66 6534.66,1009.16 5047.16,1009.16
GND on Top Layer 1 "GND_L01_P000" (solid, pour order 0): 4967,1936 4968,1935 5035,1935 5035,2038 5189,2038 5189,1916.58 5187.42,1915 4967,1915 4967,1329 5032,1264 5032,1003 4740,1003 4739,1002 4736,1003 4735,1004 4735,1936
VM on Top Layer 1 "VM_L01_P004" (solid, pour order 4): 5155,1426 5183,1426 5183,1386 5182,1387 5128,1387 5128,1282 4977,1282 4977,1903 4956.23,1923.77 5174.94,1927.78 5177.58,2053 5432,2053 5442,2043 5442,1825 5155,1825
3.3V on Top Layer 1 "3.3V_L01_P010" (solid, pour order 10): 5416,1688 5417,1689 5576,1689 5576,1688 5615,1649 5615,1488 5613,1486 5558,1486 5558,1614 5528,1644 5417,1644 5417,1686 5413,1690
ADC_BAT on Top Layer 1 "ADC_BAT_L01_P011" (solid, pour order 11): 5209,1424 5209,1327 5350,1327 5352,1329 5351,1330 5351,1366 5252,1366 5249,1363 5247,1365 5247,1424 5212,1424 5210,1426
MOTOR_B on Top Layer 1 "MOTOR_B_L01_P032" (solid, pour order 32): 6798.23,1864.44 6553.23,1864.44 6524.23,1835.44 6524.23,1449 6816.23,1449 6816.23,1866.44 6815.23,1867.44
MOTOR_A on Top Layer 1 "MOTOR_A_L01_P031" (solid, pour order 31): 6800,2269 6555,2269 6526,2240 6526,1881 6818,1881 6818,2271 6817,2272
VBAT on Top Layer 1 "VBAT_L01_P001" (solid, pour order 1): 4931,1951 5020,1951 5020,2052 5027,2059 5427,2059 5427,2272 5027,2272 4733,2272 4735.33,1951
MOTOR_C on Bottom Layer 1 "MOTOR_C_L04_P020" (solid, pour order 20): 6378,1812 6501,1812 6501,1421 6535,1387 6805,1387 6805,1006 6800,1001 6784,1017 6394,1017 6388,1023 6388,1639 6382,1639 6380,1641 6377,1641
MOTOR_B on Bottom Layer 1 "MOTOR_B_L04_P018" (solid, pour order 18): 6178,1879 6183,1874 6183,1637 6101,1637 6097,1641 6102,1646 6102,1903.54 5915.8,1904.59 5915.8,1975 6807,1975 6810,1919 6810,1452 6544,1452 6544,1795 6450,1889 6440,1879
MOTOR_B on Bottom Layer 1 "MOTOR_B_L04_P019" (solid, pour order 19): 5925,1975 5924,1974 5843,1974 5843,1633 5847,1629 5925,1629
GND on Bottom Layer 1 "GND_L04_P026" (solid, pour order 26): 5576,2263 5096,2263 5096,2068 4944,1916 4767,1916 4767,1014 4775,1006 4776,1007 6380,1007 6380,1956 6463,2039 6463,2095 5743,2095 5570,2268
MOTOR_A on Bottom Layer 1 "MOTOR_A_L04_P017" (solid, pour order 17): 5644,1808 5641,1811 5631,1811 5631,2119 6517,2119 6528,1986 6803,1986 6803,2266 6799,2262 5602,2262 5412.5,2072.5 5441,2044 5441,1701 5503,1639 5645,1639
VM on Bottom Layer 1 "VM_L04_P025" (solid, pour order 25): 5005,1505 5004,1504 5004,1097 6382,1097 6382,1524 5021,1524 5002,1505
8V on Bottom Layer 1 "8V_L04_P008" (solid, pour order 8): 5046,1677 5046,1637 4936,1637 4935,1638 4935,1753 4986,1753 4990,1749 4990,1685 5042,1685 5047,1680
8V on Bottom Layer 1 "8V_L04_P009" (solid, pour order 9): 4929,1832 4929,1759 4935,1753 4988,1751 4992,1755 4992,1770 5322,1770 5322,1613 5338,1597 5396,1597 5396,1832
VBAT on Bottom Layer 1 "VBAT_L04_P045" (solid, pour order 45): 5089,2259 5079,2249 5079,1918 4746,1918 4744,1920 4763,1939 4763,2272 5075,2272 5079,2268
MOTOR_C on Bottom Layer 1 "MOTOR_C_L04_P023" (solid, pour order 23): 6200,1660 6200,1538 6202,1540 6325,1540 6325,1580 6330,1585 6381,1585 6381,1658 6378,1661 6201,1661
MOTOR_B on Bottom Layer 1 "MOTOR_B_L04_P022" (solid, pour order 22): 5847,1629 5847,1580 5848,1581 5906,1581 5906,1537 5912,1531 5913,1532 6068,1532 6068,1589 6069,1588 6107,1588 6107,1648 5844,1648
MOTOR_A on Bottom Layer 1 "MOTOR_A_L04_P021" (solid, pour order 21): 5645,1639 5644,1640 5521,1640 5521,1527 5528,1534 5780,1534 5780,1583 5798,1601 5837,1601 5837,1637 5829,1645 5527,1645
VM on Bottom Layer 1 "VM_L04_P007" (solid, pour order 7): 5005,1598 5003,1596 5003,1467 5043,1467 5044,1466 5050,1472 5050,1555 5118,1555 5125.46,1562.46 5125.46,1599 5005,1599 5003,1597
MOTOR_C on Top Layer "MOTOR_C_L02_P038" (solid, pour order 38): 6827,1005 6825,1007 6500,1007 6500,1422 6822,1422 6822,1011 6823,1010
GND on Top Layer "GND_L02_P049" (solid, pour order 49): 4738,1003 4733,1008 4733,1922.2 5083.78,1922.2 5109.79,1948.21 5109.79,2170.21 5212.58,2273 6496,2273 6496,1011 6500,1007 6499,1006 4744,1006
VBAT on Top Layer "VBAT_L02_P043" (solid, pour order 43): 4735,2272 4737,2274 5228,2274 5228,1930 5216,1918 5214,1920 4733,1920 4733,2266 4735,2268
MOTOR_B on Top Layer "MOTOR_B_L02_P037" (solid, pour order 37): 6821,1439 6507,1439 6507,1852 6506,1853 6829,1853 6829,1520
MOTOR_A on Top Layer "MOTOR_A_L02_P036" (solid, pour order 36): 6821,1862 6496,1862 6496,2273 6495,2274 6818,2274 6818,1941
3.3V on Top Layer "3.3V_L02_P016" (solid, pour order 16): 5400,1385 5400,1207 5455,1152 5987,1152 5990,1155 5991,1151 5995,1147 5995,1064 5299,1064 5280,1083 5280,1516 5459,1695 5514,1695 5514,1499
GND on Bottom Layer "GND_L03_P030" (solid, pour order 30): 4739,1744 4741,1746 5003,1746 5003,1868 5108,1973 5108,2263 6438,2263 6521,2180 6521,996 4746,996 4741,1001 4742,1002 4742,1749
VBAT on Bottom Layer "VBAT_L03_P044" (solid, pour order 44): 4735,2281 4744,2272 5103,2272 5103,1779 5068,1744 4739,1744 4739,2273 4735,2277
MOTOR_C on Bottom Layer "MOTOR_C_L03_P042" (solid, pour order 42): 6524,1358 6527,1355 6527,1008 6813,1008 6811,1010 6811,1427 6593,1427
MOTOR_B on Bottom Layer "MOTOR_B_L03_P041" (solid, pour order 41): 6531,1836 6534,1833 6534,1432 6818,1432 6818,1488 6818,1867 6562,1867
MOTOR_A on Bottom Layer "MOTOR_A_L03_P040" (solid, pour order 40): 6530,2270 6533,2267 6533,1873 6817,1873 6817,2273 6538,2273 6537,2272